# Altium PCB Sampling.PcbDoc
Units mm, origin at the board's own origin, x right, y up, seen from the top; angles counter-clockwise.
Board outline 80 x 60 mm, 2 copper layers (Top Layer, Bottom Layer); 35 components, 29 nets, 106 pads, 4 vias.
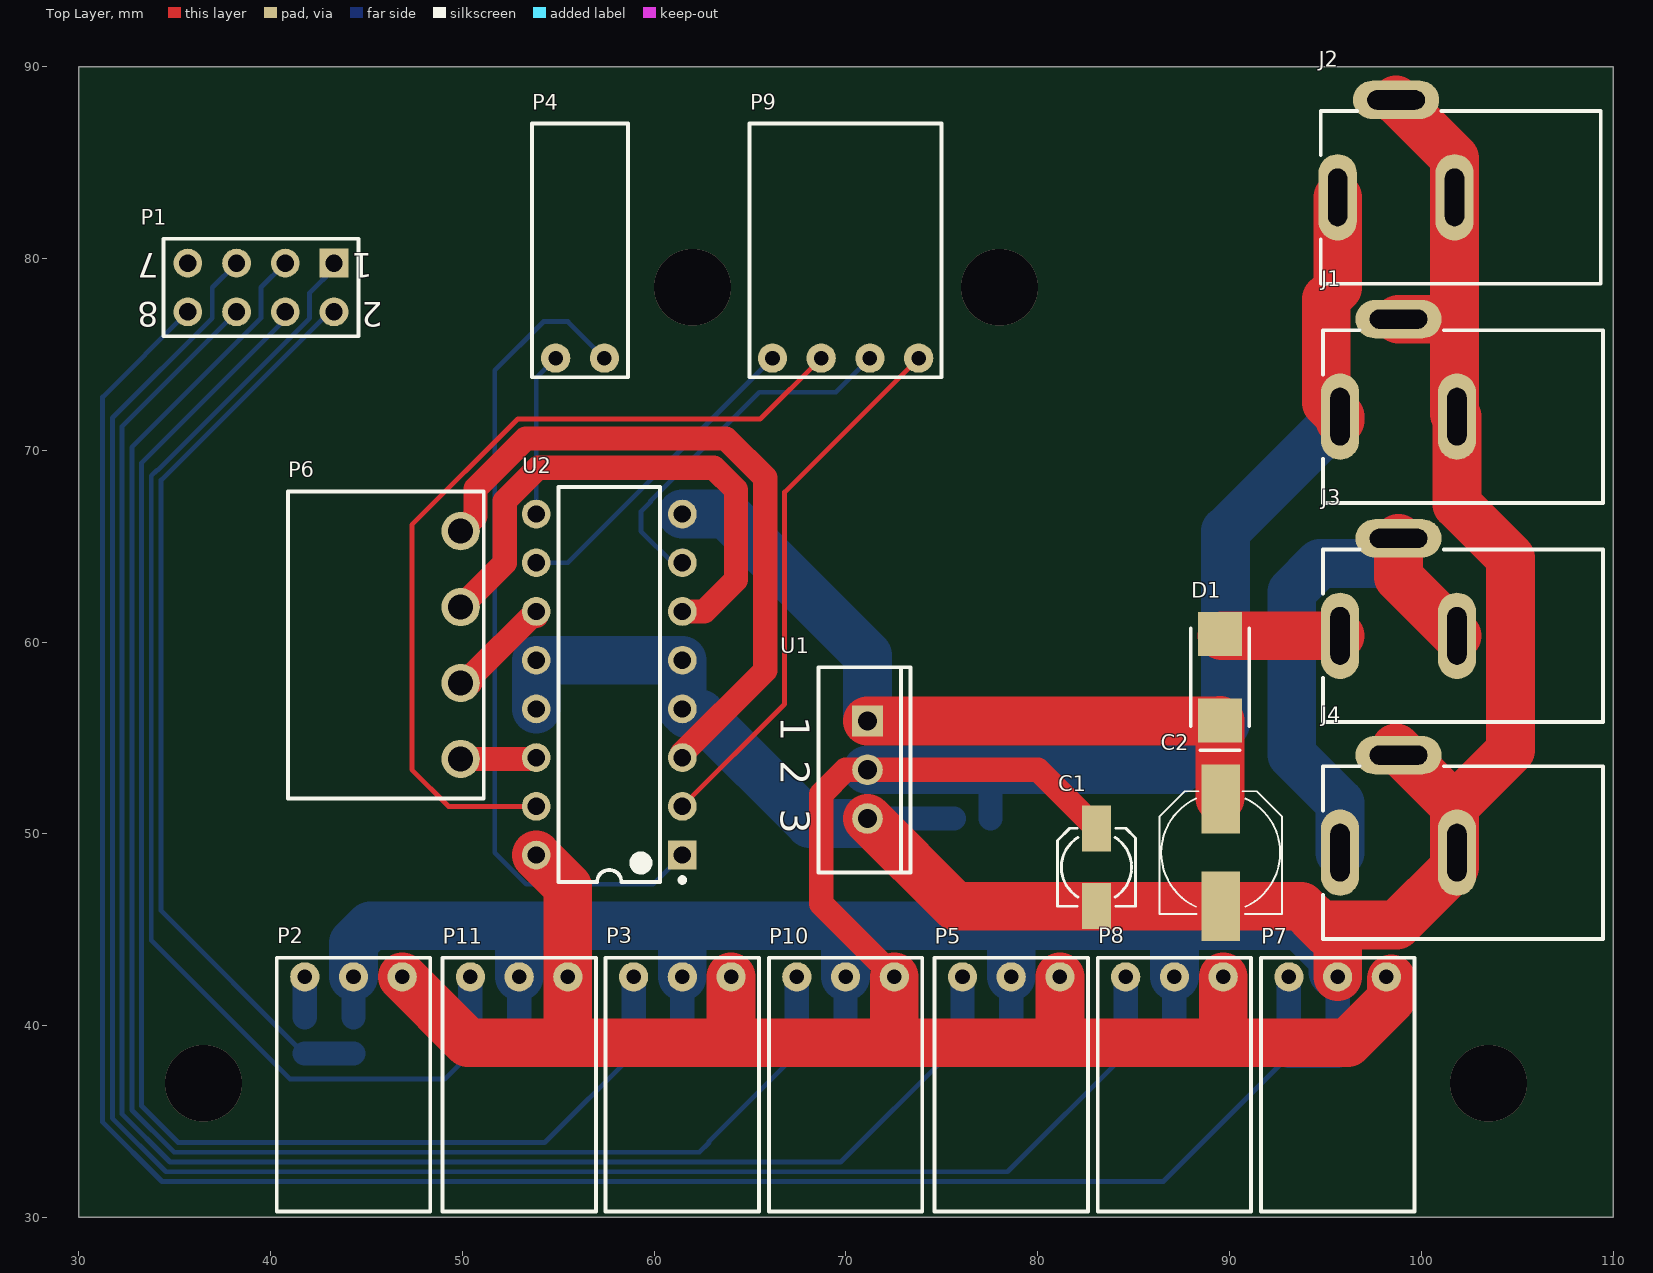
[diagram p0: Top Layer view]
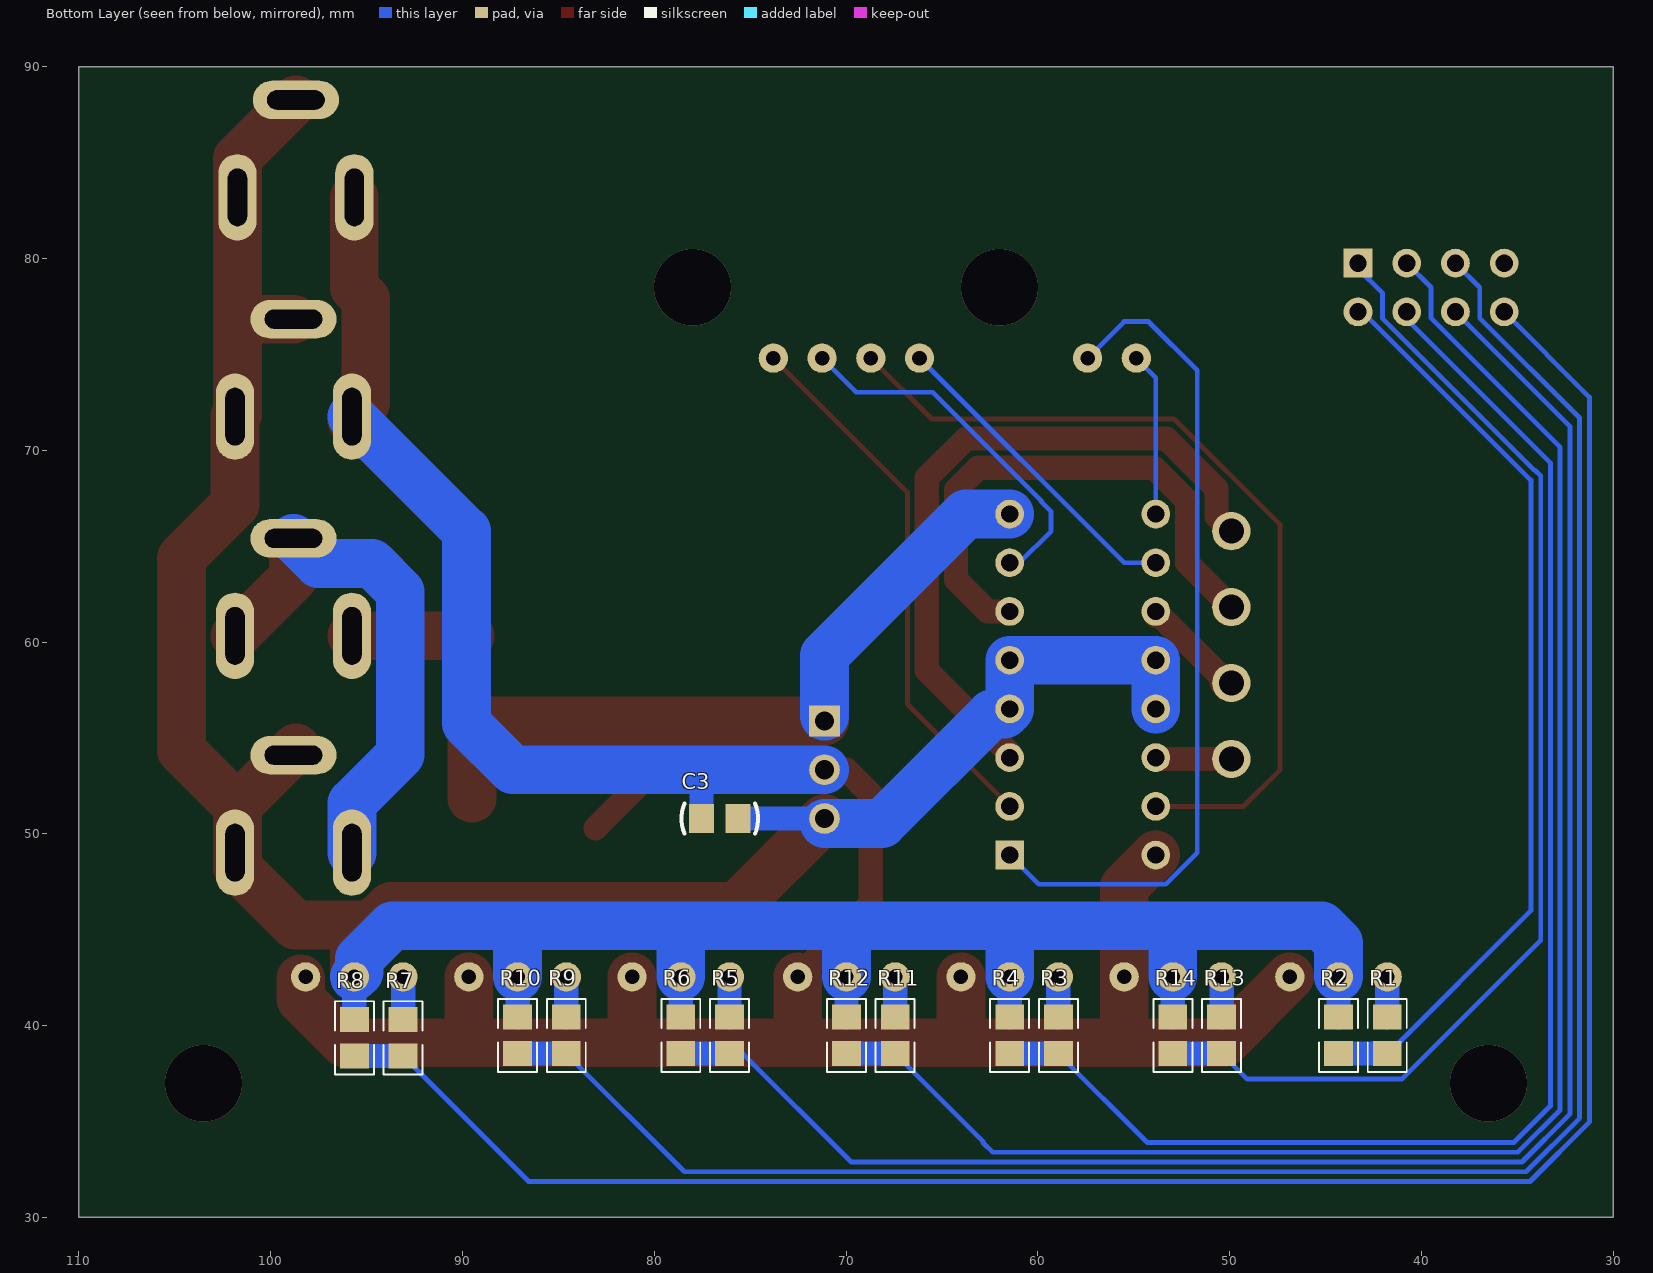
[diagram p1: Bottom Layer view, seen from below]

## Layer stack, top to bottom
Top Layer: signal copper 0.0356
Dielectric: dielectric 0.32, FR-4, Dk 4.8
Bottom Layer: signal copper 0.0356

## Board outline
30,30 110,30 110,90 30,90

## Design rules (kind name [scope] priority, off if disabled: settings)
Clearance [All] p1: gap=0.254
PolygonConnect [All] p1: connectstyle=Relief reliefconductorwidth=0.254 reliefentries=4 polygonreliefangle="90 Angle" airgapwidth=0.254
RoutingVias [All] p1: holewidth=0.711 width=1.27 viastyle="Through Hole" minholewidth=0.711 minwidth=1.27 maxholewidth=0.711 maxwidth=1.27
SolderMaskExpansion [All] p1: expansion=0.102
Width [All] p1: maxlimit=10 minlimit=0.254 preferedwidth=0.254
28 further rules are at their usual default settings.

## Components (designator, comment, footprint, x,y, rotation, side; value= is the part's Value field where it differs from the comment)
C1 "Cap Pol" C-RB-S4 83.058,48.26 r270 top
C2 "Cap Pol" C-RB-S6 89.535,49.022 r270 top
C3 "Cap" C-RAD-0805 76.581,50.8 r0 bottom
D1 "Diode" DIODE-SMA 89.499,58.166 r270 top
J1 "PWRCON" DC-005 94.869,71.755 r0 top
J2 "PWRCON" DC-005 94.742,83.185 r0 top
J3 "PWRCON" DC-005 94.869,60.325 r0 top
J4 "PWRCON" DC-005 94.869,49.022 r0 top
P1 "Header 4X2" HDR2X4 43.307,79.756 r180 top
P2 "KF25103P" KF25103P 41.783,42.545 r0 top
P3 "KF25103P" KF25103P 58.928,42.545 r0 top
P4 "KF25102P" KF25102P 57.404,74.803 r180 top
P5 "KF25103P" KF25103P 76.073,42.545 r0 top
P6 "HT396K" HT396K 49.911,65.786 r270 top
P7 "KF25103P" KF25103P 93.091,42.545 r0 top
P8 "KF25103P" KF25103P 84.582,42.545 r0 top
P9 "KF25104P" KF25104P 73.787,74.803 r180 top
P10 "KF25103P" KF25103P 67.437,42.545 r0 top
P11 "KF25103P" KF25103P 50.419,42.545 r0 top
R1 "Res1" 0805-1 41.783,39.497 r90 bottom
R2 "Res1" 0805-1 44.323,39.497 r270 bottom
R3 "Res1" 0805-1 58.928,39.497 r90 bottom
R4 "Res1" 0805-1 61.468,39.497 r270 bottom
R5 "Res1" 0805-1 76.073,39.497 r90 bottom
R6 "Res1" 0805-1 78.613,39.497 r270 bottom
R7 "Res1" 0805-1 93.091,39.37 r90 bottom
R8 "Res1" 0805-1 95.631,39.37 r270 bottom
R9 "Res1" 0805-1 84.582,39.497 r90 bottom
R10 "Res1" 0805-1 87.122,39.497 r270 bottom
R11 "Res1" 0805-1 67.437,39.497 r90 bottom
R12 "Res1" 0805-1 69.977,39.497 r270 bottom
R13 "Res1" 0805-1 50.419,39.497 r90 bottom
R14 "Res1" 0805-1 52.959,39.497 r270 bottom
U1 "LD1085V50" TO-220-AB 71.12,53.34 r270 top
U2 "SN754410PDIP" DIP-16 57.658,57.785 r180 top

## Footprints (in the part's own frame and the unit in brackets; to place one, negate y for a bottom-side part, rotate by r counter-clockwise, add the part's x,y. Pads: shape width x height; smd on the part's side, far side on the other; paste and mask are expansions set on the pad)
0805-1 [mm] "贴片带丝印"
  rect 1.3x1.5 smd: 1(-0.95,0) 2(0.95,0)
  silkscreen extent -1.91,-1.02 1.91,1.02, body extent -1.14,-0.51 1.14,0.51, height 1
C-RAD-0805 [mm] "贴片电容"
  rect 1.3x1.5 smd: 1(-0.95,0) 2(0.95,0)
  silkscreen extent -2,-0.79 2,0.79, body extent -1.27,-0.64 1.27,0.64, height 0.9
C-RB-S4 [mm]
  rect 2.4x1.5 smd: 1(-2.032,0) 2(2.032,0)
  silkscreen extent -2.03,-2.03 2.03,2.03
C-RB-S6 [mm] "贴片电解"
  rect 3.6x2 smd: 1(-2.794,0) 2(2.794,0)
  silkscreen extent -3.2,-3.2 3.2,3.2
DC-005 [mm] "DC母座5.5mm"
  oval 2x4.5 hole 1 slot 3 at 90 deg: 1(0.889,0) 2(6.985,0)
  oval 4.5x2 hole 1 slot 3 at 0 deg: 3(3.937,5.08)
  silkscreen extent 0,-4.5 14.6,4.5, body extent 0,-4.44 14.6,4.44, height 11
DIODE-SMA [mm] "贴片二极管"
  rect 2.3x2.3 smd: 1(-2.25,0) 2(2.25,0)
  silkscreen extent -2.54,-1.52 3.81,1.52, body extent -2.92,-1.4 2.92,1.4, height 3
DIP-16 [mm] "DIP; 16 Leads; Row Spacing 7.62 mm; Pitch 2.54 mm"
  rect 1.5x1.5 hole 0.9: 1(-3.81,8.89)
  round 1.5 hole 0.9: 2(-3.81,6.35) 3(-3.81,3.81) 4(-3.81,1.27) 5(-3.81,-1.27) 6(-3.81,-3.81) 7(-3.81,-6.35) 8(-3.81,-8.89) 9(3.81,-8.89) 10(3.81,-6.35) 11(3.81,-3.81) 12(3.81,-1.27) 13(3.81,1.27) 14(3.81,3.81) 15(3.81,6.35) 16(3.81,8.89)
  silkscreen extent -3.94,-10.3 2.65,10.31, body extent -3.6,-10.28 3.6,10.28, height 5.08
HDR2X4 [mm] "Connector; Header; 4x2 Position"
  rect 1.5x1.5 hole 0.9: 1(0,0)
  round 1.5 hole 0.9: 2(0,2.54) 3(2.54,0) 4(2.54,2.54) 5(5.08,0) 6(5.08,2.54) 7(7.62,0) 8(7.62,2.54)
  silkscreen extent -1.27,-1.27 8.89,3.81
HT396K [mm]
  round 2 hole 1.3: 1(0,0) 2(3.96,0) 3(7.92,0) 4(11.88,0)
  silkscreen extent -2.06,-9 13.94,1.2
KF25102P [mil]
  round 60 hole 30: 1(0,0) 2(100,0)
  silkscreen extent -48,-482 148,39
KF25103P [mil]
  round 60 hole 30: 1(0,0) 2(100,0) 3(200,0)
  silkscreen extent -57,-482 257,39
KF25104P [mil]
  round 60 hole 30: 1(0,0) 2(100,0) 3(200,0) 4(300,0)
  silkscreen extent -47,-482 347,39
TO-220-AB [mm] "TO, Thru-Hole, Vertical, Heatsink Mounted; 3 In-Line Leads; Pitch 2.54 mm"
  rect 1.6x1.6 hole 1: 1(-2.54,0)
  round 1.6 hole 1: 2(0,0) 3(2.54,0)
  silkscreen extent -5.35,-2.55 5.35,2.25

## Part data
C1 C2: "极性电解电容"
C3: "无极性电容"
D1: "二极管"
J1 J2 J3 J4: "直流电源端子"
P1: "Header, 4-Pin, Dual row"
R1 R2 R3 R4 R5 R6 R7 R8 R9 R10 R11 R12 R13 R14: "贴片电阻"

## Via types
v1: diameter 4, hole 4, Top Layer to Bottom Layer, 4 vias

## Nets (pads, with @x,y where several pads share a name; then routed paths per layer and width w, separated by ;. In a path a pad name is that pad's centre, name@x,y a point inside that pad or via, vN(x,y) a via of type N, cw(c..) or ccw(c..) an arc to the next point about the centre after c; other vN are vias at no path point)
GND: C1.2 C2.2 C3.1 J1.2 J1.3 J2.2 J2.3 J4.2 J4.3 P2.2 P3.2 P5.2 P7.2 P8.2 P10.2 P11.2 R2.1 R4.1 R6.1 R8.1 R10.1 R12.1 R14.1 U1.3 U2.4 U2.5 U2.12 U2.13 | length 200.9
  Top Layer w2.54: U1.3 75.692,46.228 C1.2 C2.2 93.733,46.228 94.713,45.248 ; P7.2 95.631,44.33 94.713,45.248 ; J4.3@98.679,54.483 101.727,51.435 ; J2.3 101.727,85.217 J2.2 J1.2@101.727,71.882 ; J1.3 101.6,76.835 ; J1.2 101.854,67.176 104.648,64.382 104.648,54.356 101.727,51.435 ; 94.713,45.248 98.715,45.248 101.727,48.26 101.727,51.435
  Bottom Layer w1.27: R2.1 P2.2 P2.2@44.528,42.545 ; R14.1 P11.2 ; R4.1 P3.2 ; R12.1 P10.2 ; 69.977,44.958 70.104,45.085 ; U1.3 C3.1 ; R6.1 P5.2 ; P8.2@86.995,42.672 P8.2 R10.1 ; P7.2@95.426,42.545 P7.2 R8.1
  Bottom Layer w2.54: P2.2 44.323,44.323 45.212,45.212 52.959,45.212 ; P11.2 52.959,45.212 ; U2.13 U2.12 U2.5 U2.4 61.734,56.249 62.41,56.249 68.113,50.546 U1.3@71.12,50.546 ; P3.2 61.468,45.212 ; P10.2 69.977,44.958 ; P5.2 78.613,44.958 78.359,45.212 ; P8.2 87.122,45.212 ; P7.2 95.377,42.799 95.377,43.492 93.657,45.212 87.122,45.212 ; 52.959,45.212 61.468,45.212 ; 61.468,45.212 78.359,45.212 ; 78.359,45.212 87.122,45.212
NetC2_1: C2.1 D1.2 U1.1 U2.8 | length 38.3
  Top Layer w2.54: U1.1 D1.2@89.463,55.88 ; C2.1@89.499,51.852 D1.2
  Bottom Layer w2.54: U2.8 63.754,66.675 71.12,59.309 U1.1@71.12,56.134
NetD1_1: D1.1 J3.1 | length 6.2
  Top Layer w2.54: D1.1@89.59,60.325 J3.1
NetJ3_2: J3.2 J3.3 J4.1 | length 27.7
  Top Layer w2.54: J3.3 98.806,63.373 J3.2
  Bottom Layer w2.54: J4.1 95.758,51.605 93.234,54.129 93.234,62.62 94.713,64.099 97.5,64.099 J3.3
NetP1_1: P1.1 R13.1 R14.2 | length 62
  Bottom Layer w0.254: P1.1 43.307,79.478 42.037,78.208 42.037,76.887 34.111,68.961 34.08,68.961 33.782,68.663 33.782,44.45 41.021,37.211 49.083,37.211 R13.1
  Bottom Layer w1.27: R13.1 R14.2
NetP1_2: P1.2 R1.1 R2.2 | length 48.2
  Bottom Layer w0.254: R1.1 41.744,38.547 34.29,46.001 34.29,68.453 34.322,68.453 43.085,77.216 P1.2
  Bottom Layer w1.27: R1.1 R2.2
NetP1_3: P1.3 R11.1 R12.2 | length 87.8
  Bottom Layer w0.254: P1.3 39.497,78.486 39.497,76.887 32.766,70.156 32.766,35.604 34.969,33.401 62.357,33.401 62.865,33.909 62.865,33.975 R11.1
  Bottom Layer w1.27: R11.1 R12.2
NetP1_4: P1.4 R3.1 R4.2 | length 75.4
  Bottom Layer w0.254: P1.4 40.767,76.835 33.274,69.342 33.274,35.814 35.179,33.909 54.29,33.909 R3.1
  Bottom Layer w1.27: R3.1 R4.2
NetP1_5: P1.5 R9.1 R10.2 | length 106.3
  Bottom Layer w0.254: P1.5 36.957,78.486 36.957,76.887 31.75,71.68 31.75,35.183 34.548,32.385 78.42,32.385 R9.1
  Bottom Layer w1.27: R9.1 R10.2
NetP1_6: P1.6 R5.1 R6.2 | length 94
  Bottom Layer w0.254: P1.6 32.258,71.247 32.258,35.393 34.758,32.893 69.723,32.893 75.377,38.547 R5.1
  Bottom Layer w1.27: R5.1 R6.2
NetP1_8: P1.8 R7.1 R8.2 | length 112.6
  Bottom Layer w0.254: P1.8@35.814,77.089 P1.8 31.242,72.771 31.242,34.972 34.337,31.877 86.548,31.877 R7.1
  Bottom Layer w1.27: R7.1 R8.2
NetP2_1: P2.1 R1.2 | length 2.1
  Bottom Layer w1.27: R1.2 P2.1
NetP3_1: P3.1 R3.2 | length 2.1
  Bottom Layer w1.27: R3.2 P3.1
NetP4_1: P4.1 U2.1 | length 43.8
  Bottom Layer w0.254: P4.1 55.499,76.708 54.229,76.708 51.689,74.168 51.689,49.022 53.34,47.371 59.944,47.371 U2.1
NetP4_2: P4.2 U2.9 | length 8.5
  Bottom Layer w0.254: U2.9 53.848,73.787 P4.2
NetP5_1: P5.1 R5.2 | length 2.1
  Bottom Layer w1.27: R5.2 P5.1
NetP6_1: P6.1 U2.3 | length 35.9
  Top Layer w1.27: P6.1 50.685,66.56 50.685,67.985 53.312,70.612 63.738,70.612 65.786,68.564 65.786,58.515 61.468,54.197 U2.3
NetP6_2: P6.2 U2.6 | length 27.9
  Top Layer w1.27: P6.2 52.209,64.124 52.209,67.354 53.943,69.088 63.107,69.088 64.262,67.933 64.262,63.246 62.611,61.595 U2.6
NetP6_3: P6.3 U2.11 | length 5.4
  Top Layer w1.27: P6.3@50.419,57.866 50.419,58.166 U2.11 U2.11@53.848,61.373
NetP6_4: P6.4 U2.14 | length 4
  Top Layer w0.254: U2.14@53.779,53.906 U2.14
  Top Layer w1.27: P6.4 U2.14@53.779,53.906
NetP7_1: P7.1 R7.2 | length 2.2
  Bottom Layer w1.27: R7.2 P7.1
NetP8_1: P8.1 R9.2 | length 2.1
  Bottom Layer w1.27: R9.2 P8.1
NetP9_1: P9.1 U2.2 | length 28.7
  Top Layer w0.254: U2.2@61.468,51.689 U2.2 66.802,56.769 66.802,67.818 P9.1
NetP9_2: P9.2 U2.7 | length 19.8
  Bottom Layer w0.254: U2.7@61.468,64.77 U2.7 60.96,64.135 59.309,65.786 59.309,66.802 59.817,67.31 59.817,67.359 65.483,73.025 69.469,73.025 P9.2
NetP9_3: P9.3 U2.15 | length 45
  Top Layer w0.254: U2.15 49.276,51.435 47.371,53.34 47.371,66.108 52.891,71.628 65.532,71.628 P9.3
NetP9_4: P9.4 U2.10 | length 16.7
  Bottom Layer w0.254: U2.10 55.499,64.135 P9.4
NetP10_1: P10.1 R11.2 | length 2.1
  Bottom Layer w1.27: R11.2 P10.1
NetP11_1: P11.1 R13.2 | length 2.1
  Bottom Layer w1.27: R13.2 P11.1
VCC5V: C1.1 C3.2 J1.1 J2.1 P2.3 P3.3 P5.3 P7.3 P8.3 P10.3 P11.3 U1.2 U2.16 | length 159.4
  Top Layer w1.27: P10.3 68.707,46.355 68.707,52.07 69.977,53.34 U1.2 80.01,53.34 C1.1
  Top Layer w2.54: P2.3 50.292,39.116 55.626,39.116 ; U2.16 55.499,47.244 P11.3 55.499,39.243 55.626,39.116 ; P3.3 64.008,39.116 ; P10.3 72.517,39.116 ; P5.3 81.153,39.116 ; P8.3 89.662,39.243 89.535,39.116 ; J2.1 95.631,78.479 95.032,77.88 95.032,72.481 J1.1 J1.1@95.758,71.556 ; P7.3@98.425,42.454 98.425,41.388 96.153,39.116 89.535,39.116 ; 55.626,39.116 64.008,39.116 ; 64.008,39.116 72.517,39.116 ; 72.517,39.116 81.153,39.116 ; 81.153,39.116 89.535,39.116
  Bottom Layer w1.27: C3.2 77.531,53.274 77.597,53.34
  Bottom Layer w2.54: U1.2 77.597,53.34 87.376,53.34 89.789,55.753 89.789,65.786 J1.1
pads on no net: P1.7
copper on no net:
  other v1: 36.5,37 103.5,37 62,78.5 78,78.5

## Silkscreen, mask and mechanical layers (free items; w line width, h text height)
Mechanical 1:
  the board outline again, w0.2

## Text inside footprints (layer, text, board x,y; h text height)
P1: Top Overlay "8" at 34.163,77.724 h1.27 r180; Top Overlay "7" at 34.163,80.264 h1.27 r180; Top Overlay "1" at 45.339,80.264 h1.27 r180; Top Overlay "2" at 45.847,77.724 h1.27 r180
U1: Top Overlay "3" at 66.595,51.3 h1.5 r270; Top Overlay "2" at 66.595,53.84 h1.5 r270; Top Overlay "1" at 66.595,56.13 h1.5 r270